# Altium PCB PCB1.PcbDoc
Units mil, origin at the board's own origin, x right, y up, seen from the top; angles counter-clockwise.
Board outline 3000 x 3000 mil, 4 copper layers (Top Layer, Internal Plane 1, Signal Layer 1, Bottom Layer), stack 30.634 mil thick; 6 components, 7 nets, 154 pads, 1 vias.
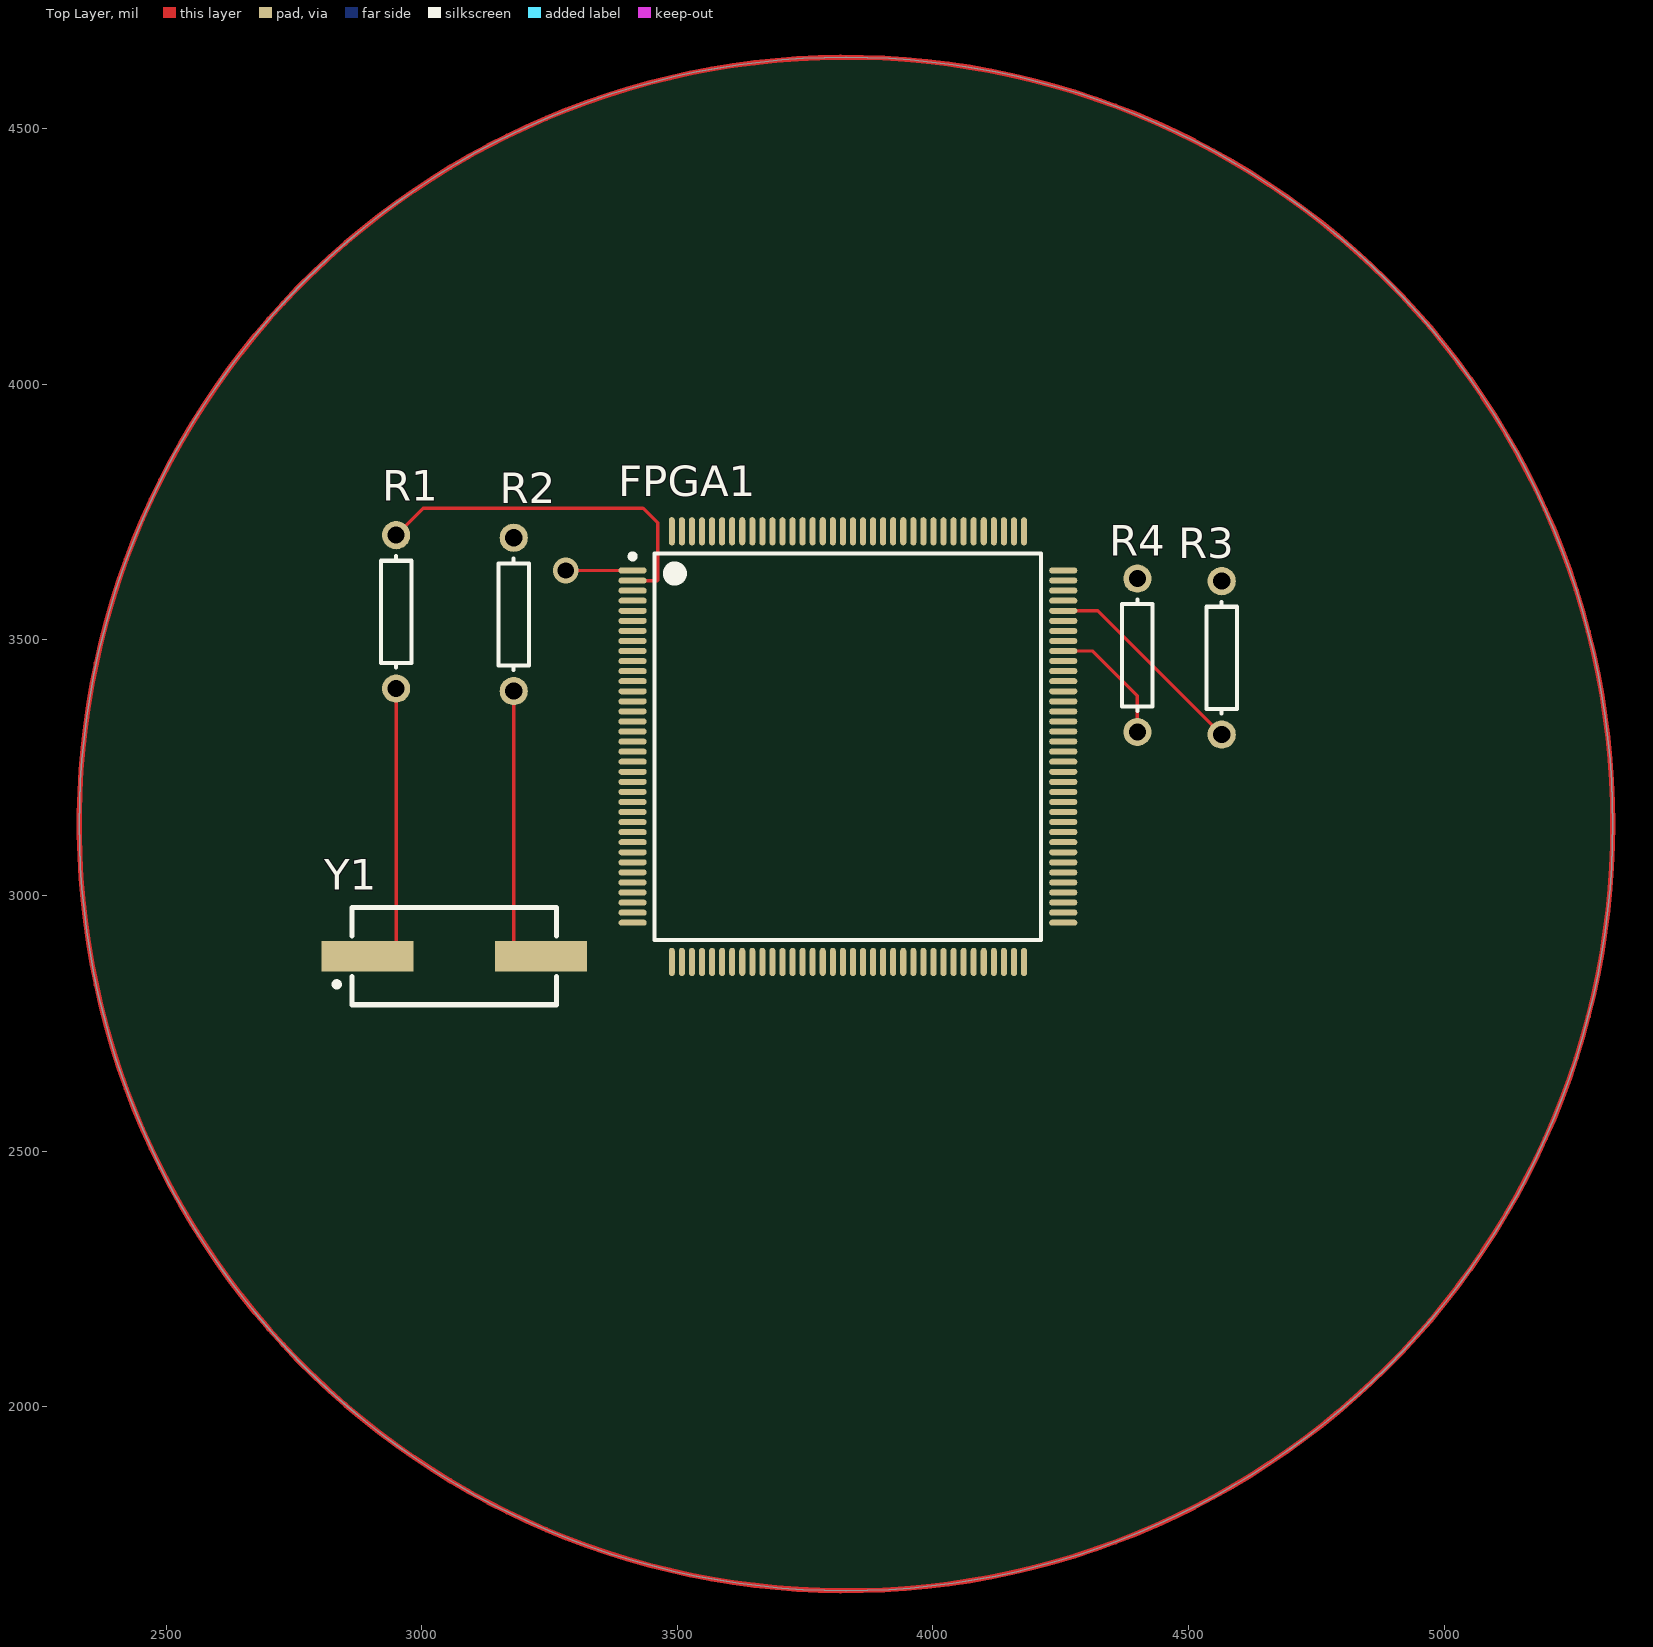
[diagram p0: Top Layer view]
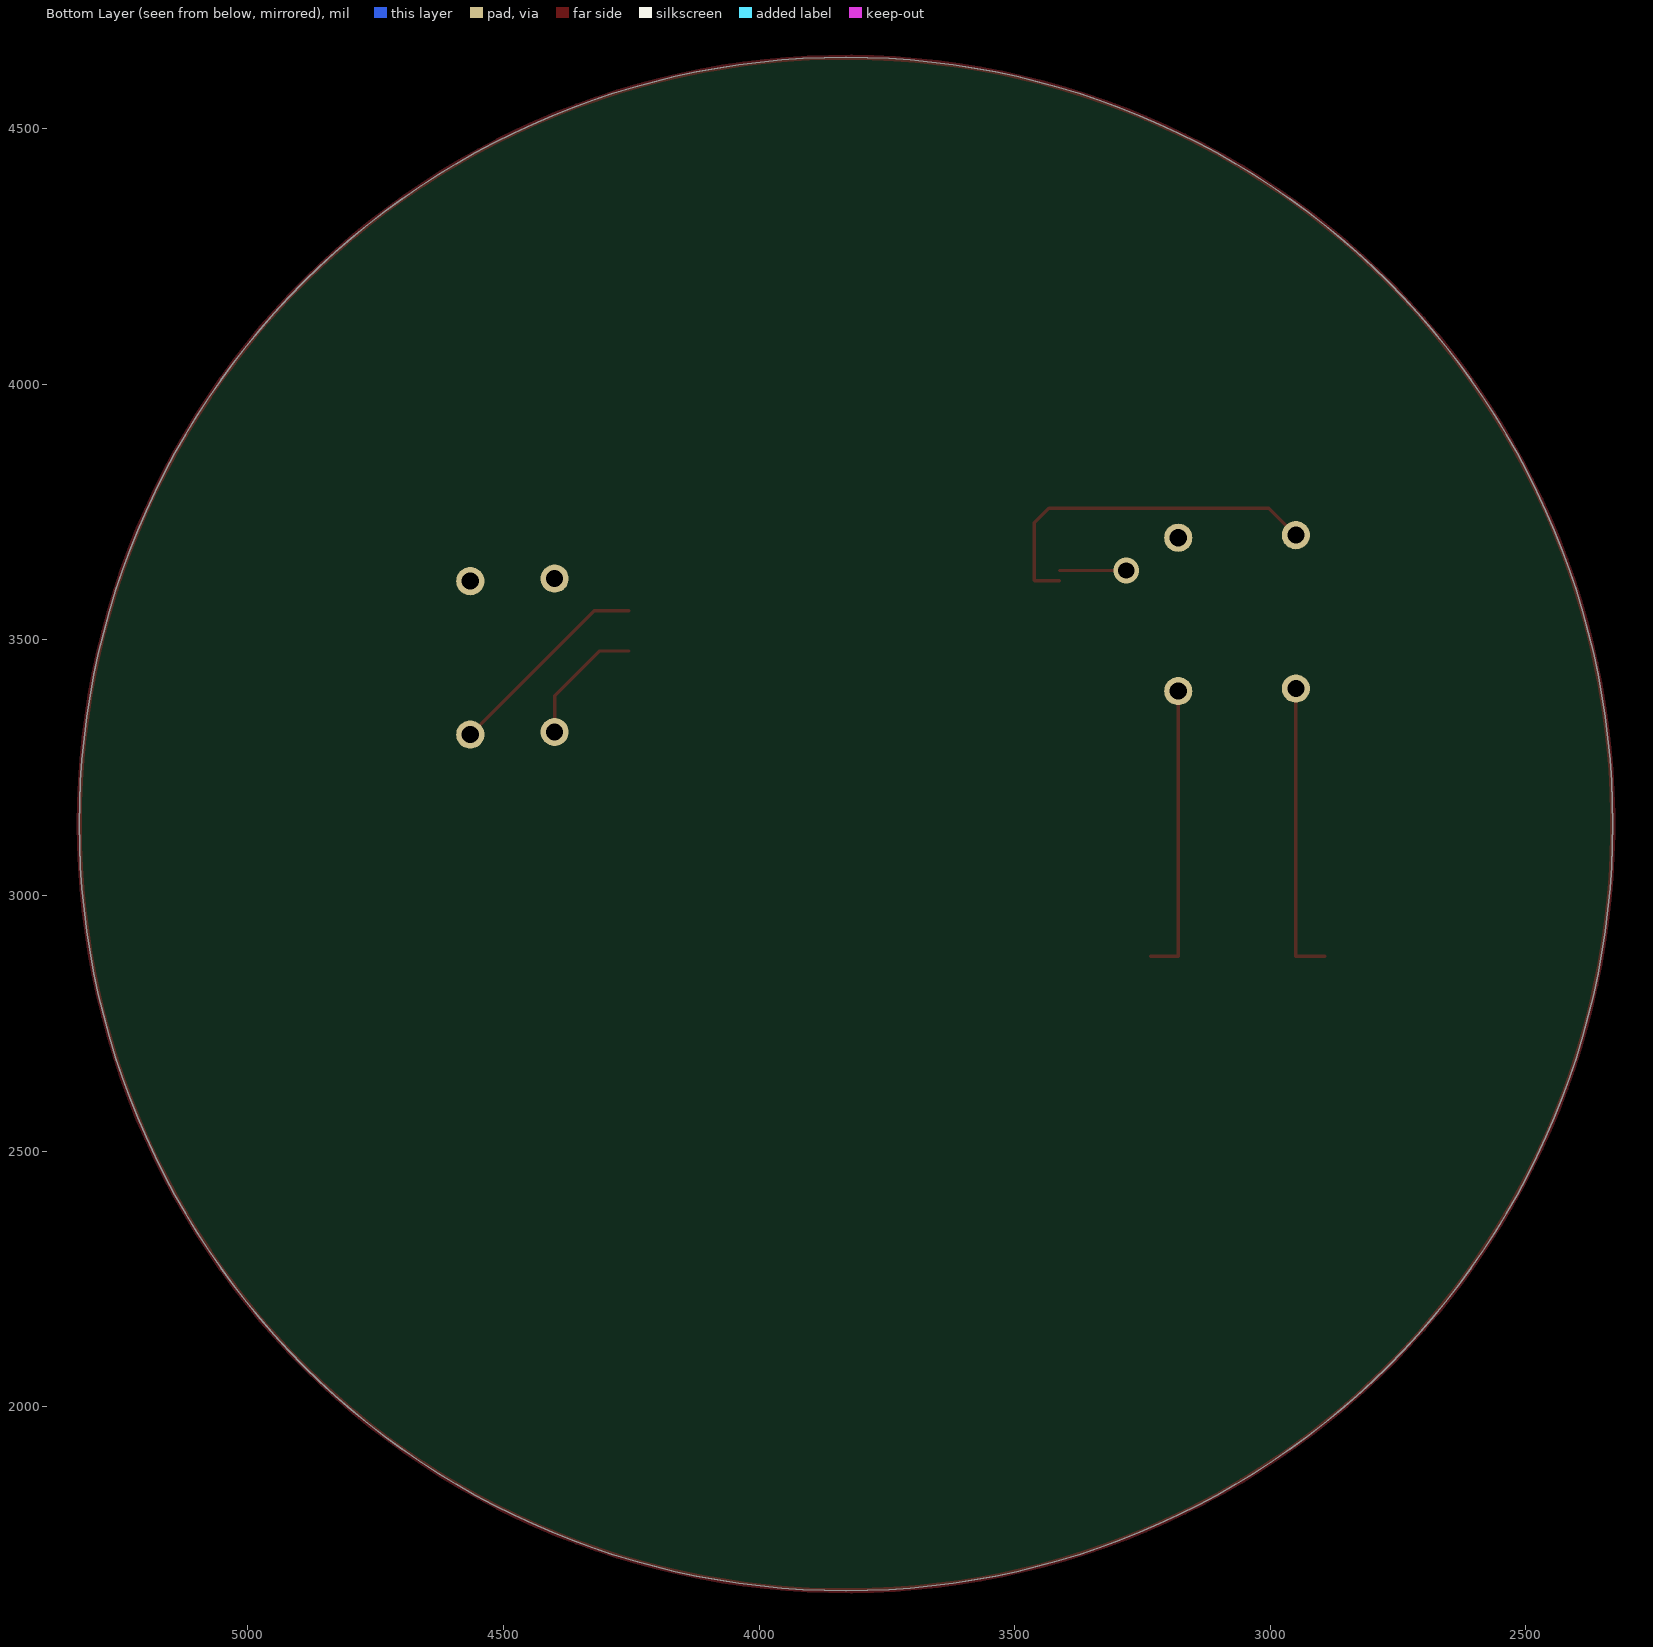
[diagram p1: Bottom Layer view, seen from below]
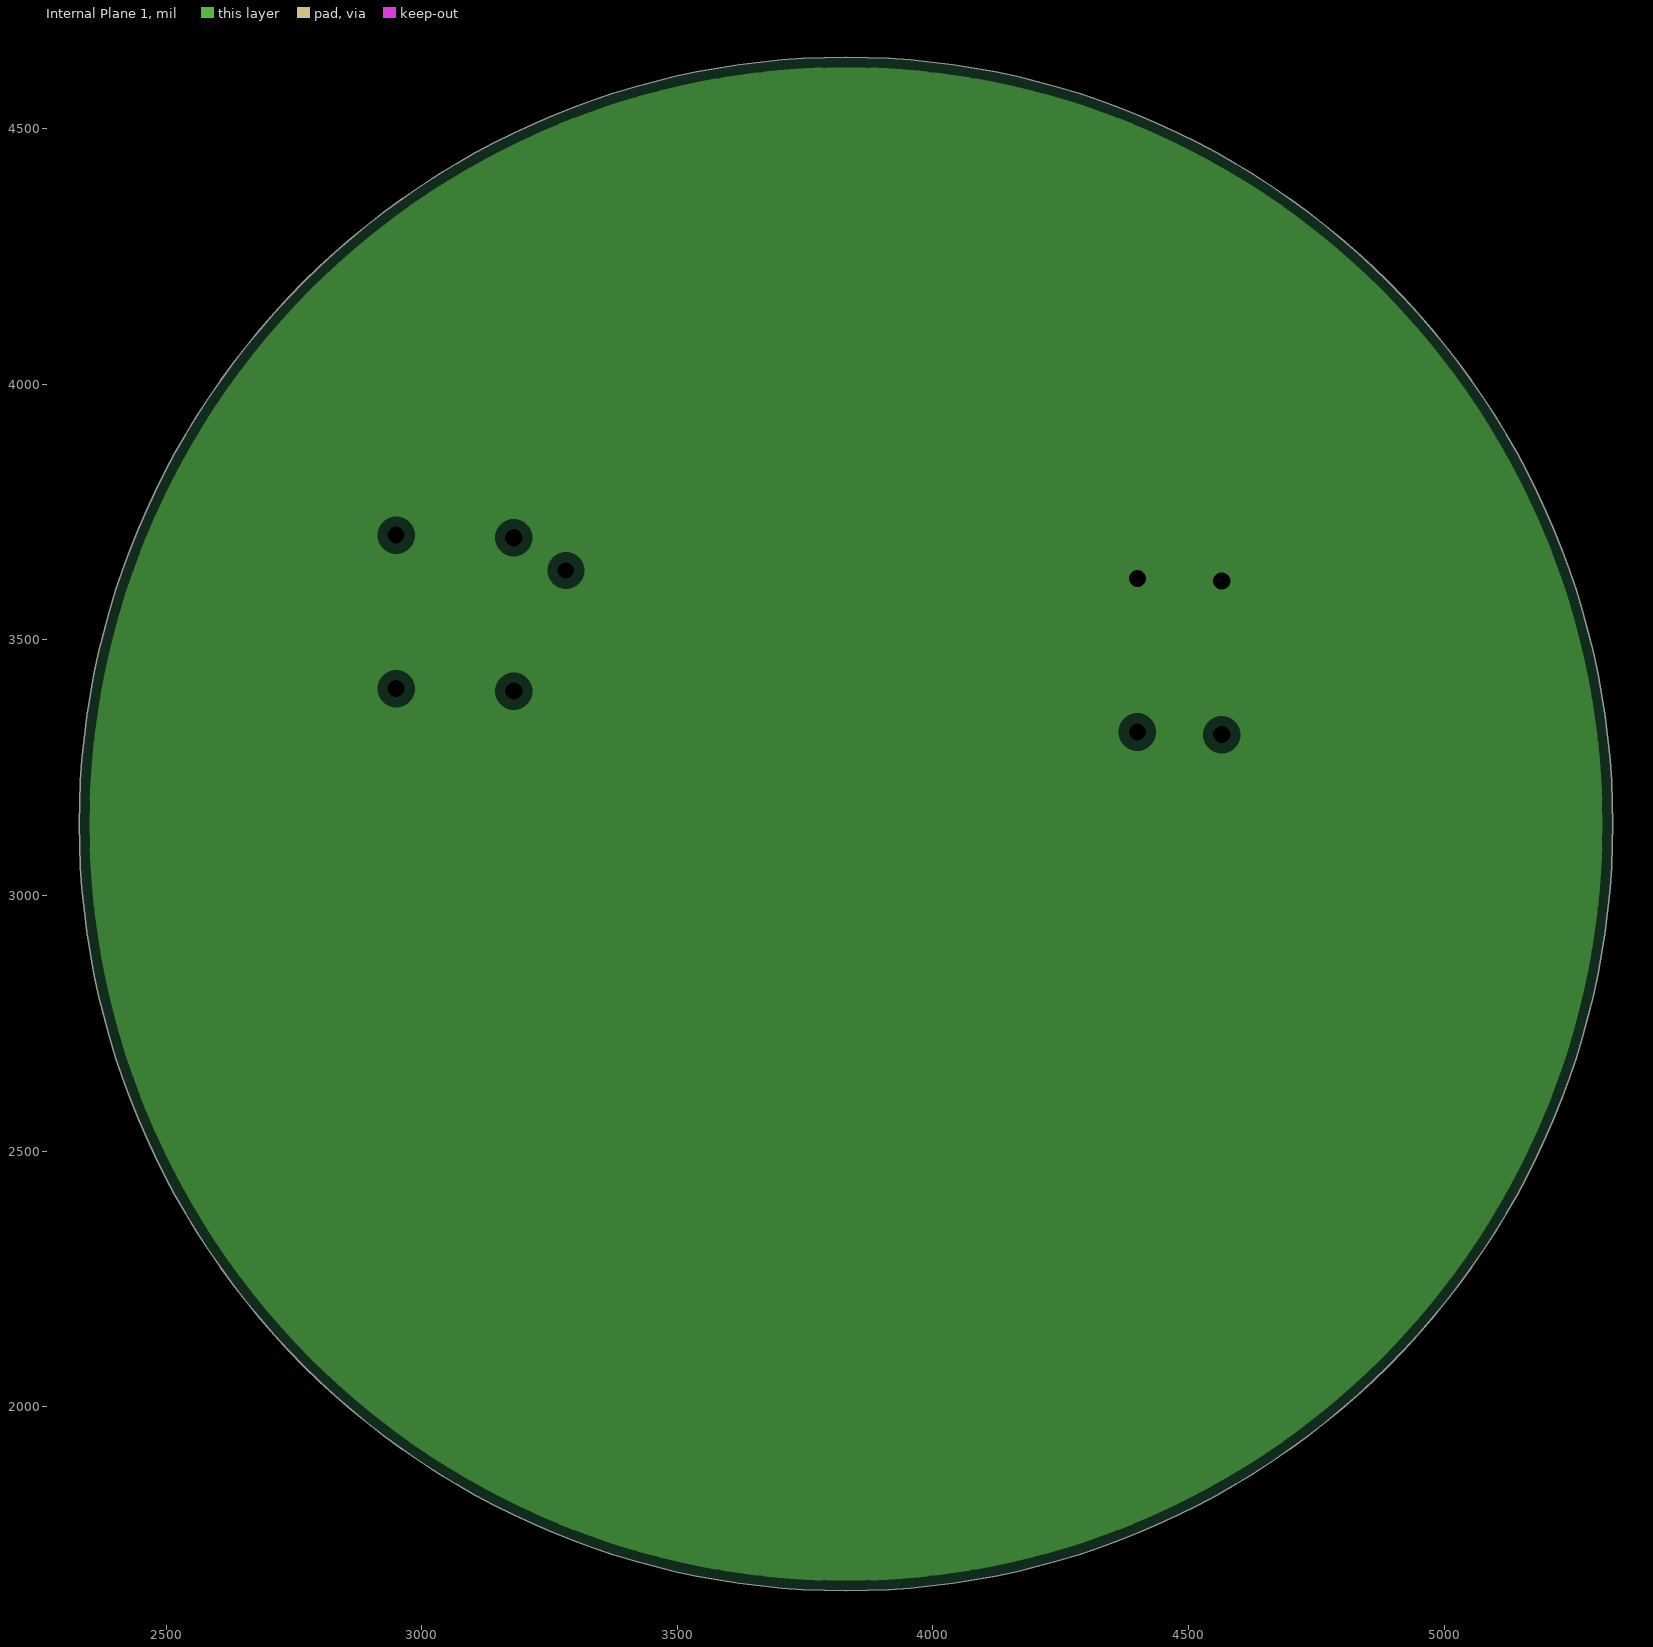
[diagram p2: Internal Plane 1, clearances drawn from the general rule]
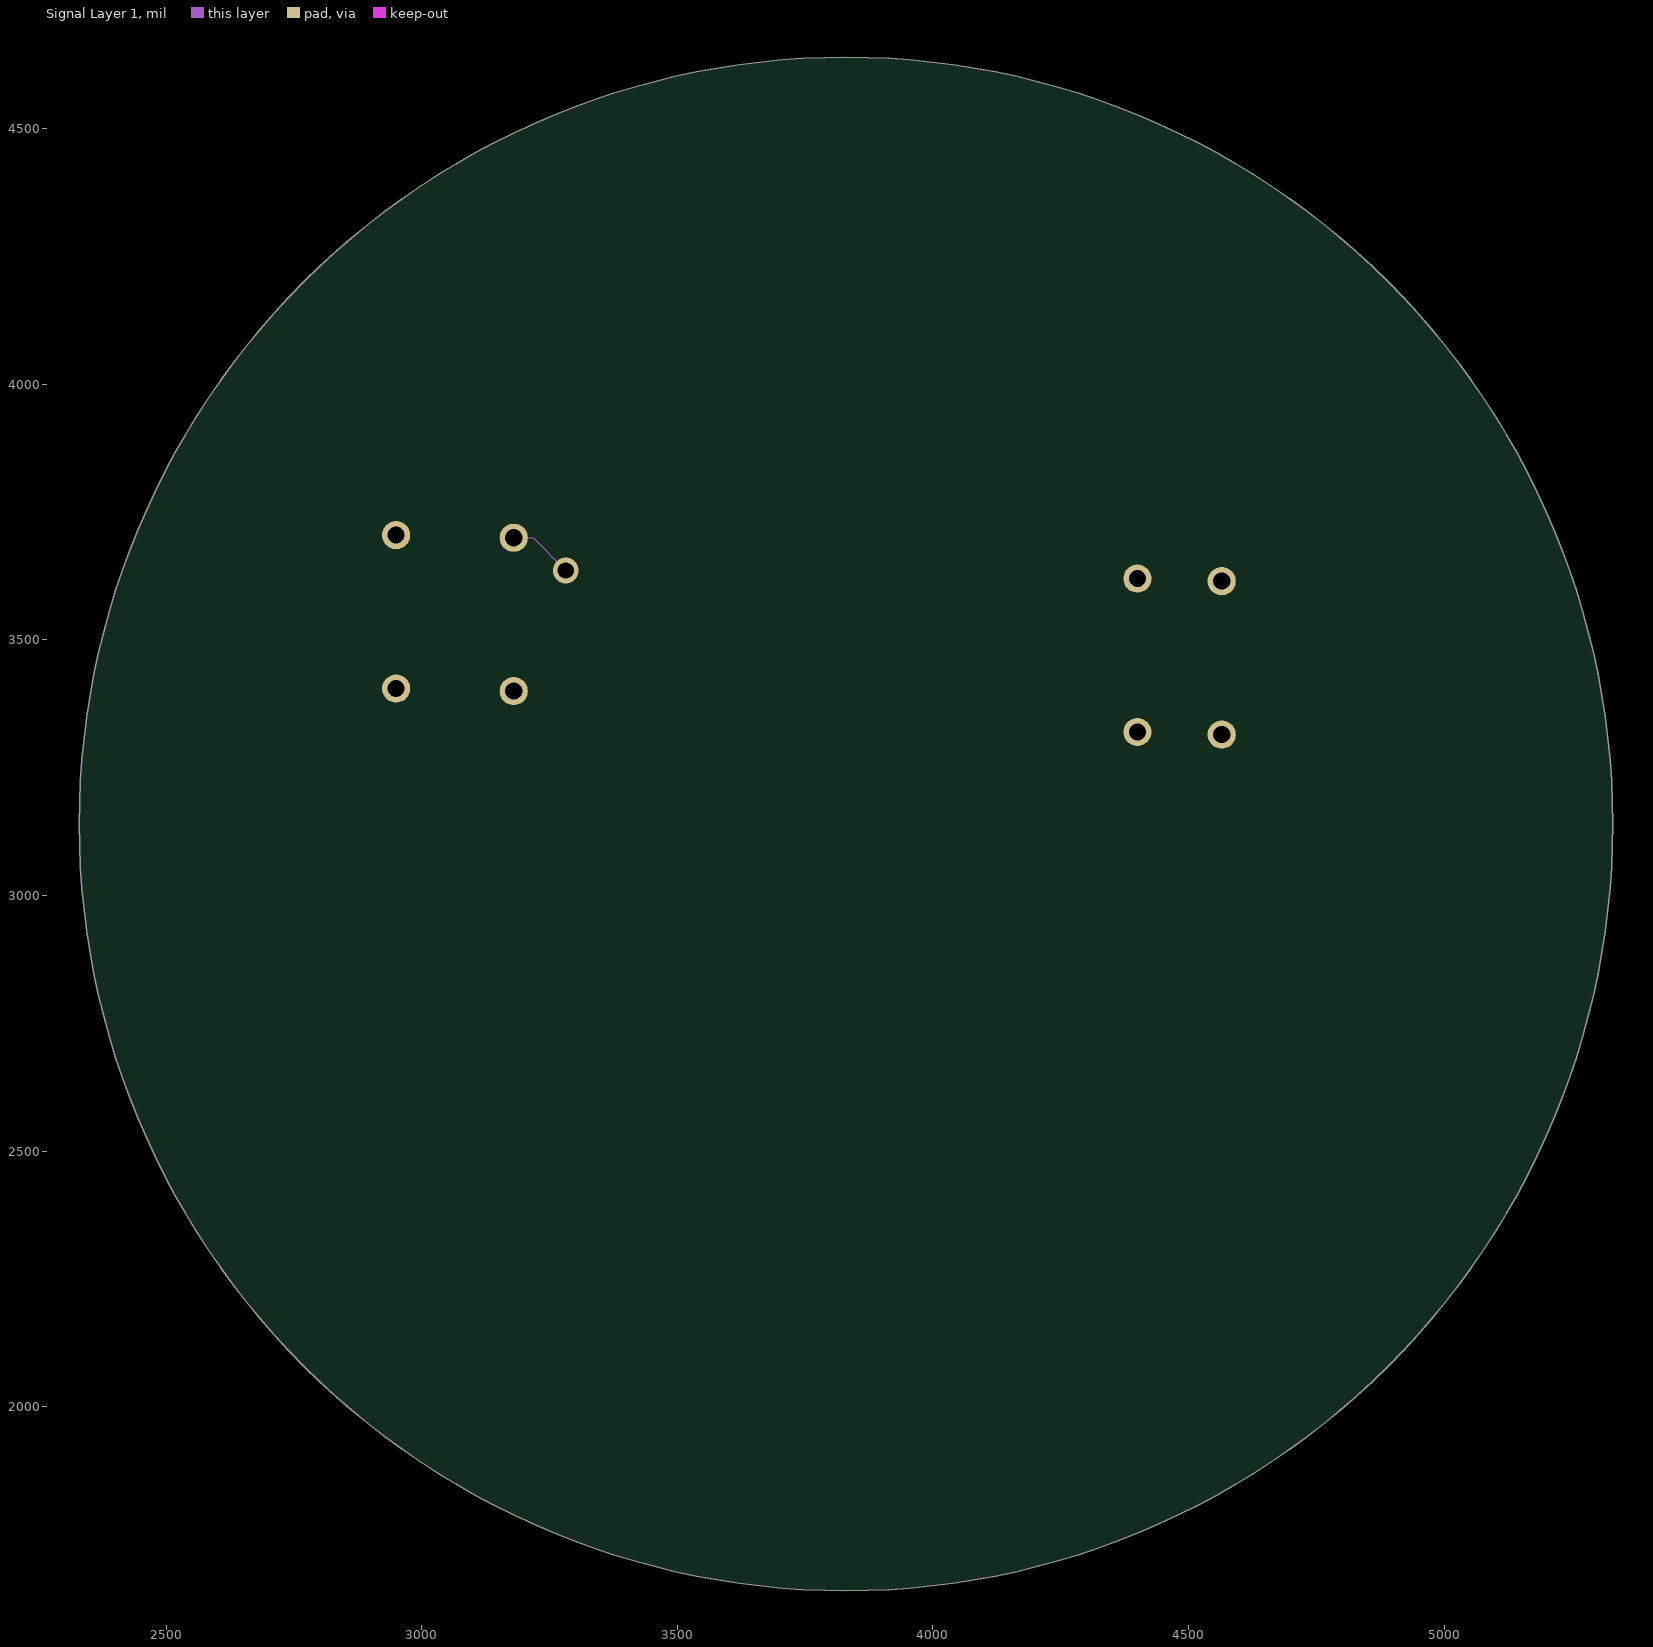
[diagram p3: Signal Layer 1]

## Layer stack, top to bottom
Top Solder: solder mask 0.4, Solder Resist, Dk 3.5
Top Layer: signal copper 1.4
Dielectric 1: core 10, FR-4, Dk 4.5
Internal Plane 1: plane copper 1.417, net VCC
Dielectric 2: prepreg 5, Dk 4.5
Signal Layer 1: signal copper 1.417
Dielectric 3: core 10, Dk 4.5
Bottom Layer: signal copper 1.4
Bottom Solder: solder mask 0.4, Solder Resist, Dk 3.5

## Board outline
2330,3140 ccw(c3830,3140) 3830,1640 ccw(c3830,3140) 5330,3140 ccw(c3830,3140) 3830,4640 ccw(c3830,3140)

## Design rules (kind name [scope] priority, off if disabled: settings)
Clearance [All] p1: gap=10 except(0: Arc-Text Track-Text SMDPad-Text THPad-Text Via-Text Fill-Text Poly-Text Region-Text Text-Text; 7.87: Track-Track SMDPad-SMDPad)
PlaneClearance [All] p1: clearance=20
PlaneConnect [All] p1: planeconnectstyle=Relief reliefexpansion=20 reliefentries=4 reliefconductorwidth=10 reliefairgap=10
PolygonConnect [All] p1: connectstyle=Relief reliefconductorwidth=10 reliefentries=4 polygonreliefangle="90 Angle" airgapwidth=10
RoomDefinition Probando_libreriaCreada [InComponentClass('Probando_libreriaCreada')] p1: confinementstyle=ConfineIn formatcopy=TRUE lockcomponents=FALSE outline 2773.74,2722.17 4697.48,2722.17 4697.48,3801.38 2773.74,3801.38
RoutingVias [All] p1: holewidth=32 width=50 viastyle="Through Hole" minholewidth=32 minwidth=50 maxholewidth=32 maxwidth=50
SolderMaskExpansion [All] p1: expansion=4 useseparateexpansions=TRUE expansionbottom=4
Width Width_VDD [InNet('VCC')] p1: maxlimit=20 minlimit=20 preferedwidth=20
Width [All] p2: maxlimit=11.89 minlimit=2.38 preferedwidth=11.89 toplayer_minwidth=6.56 toplayer_maxwidth=6.56 toplayer_prefwidth=6.56 midlayer1_maxwidth=2.38 midlayer1_prefwidth=2.38 bottomlayer_minwidth=11.89 impedancedriven=TRUE minimp=70.000000 maximp=70.000000 favimp=70.000000
28 further rules are at their usual default settings.

## Components (designator, comment, footprint, x,y, rotation, side; value= is the part's Value field where it differs from the comment)
FPGA1 "Xilinx TQG144" TSQFP50P2200X2200X160-144N_v2 3833.74,3291.38 r0 top
R1 "Res1" AXIAL-0.3 2950,3555 r270 top
R2 "Res1" AXIAL-0.3 3180,3550 r270 top
R3 "Res1" AXIAL-0.3 4565,3465 r90 top
R4 "Res1" AXIAL-0.3 4400,3470 r90 top
Y1 "crystal 25MHz" xtal 3063.74,2881.38 r0 top

## Footprints (in the part's own frame and the unit in brackets; to place one, negate y for a bottom-side part, rotate by r counter-clockwise, add the part's x,y. Pads: shape width x height; smd on the part's side, far side on the other; paste and mask are expansions set on the pad)
AXIAL-0.3 [mm] "Axial Device, Thru-Hole; 2 Leads; 0.3 in Pin Spacing"
  round 1.4 hole 0.85: 1(-3.81,0) 2(3.81,0)
  silkscreen extent -2.77,-0.76 2.77,0.76
TSQFP50P2200X2200X160-144N_v2 [mm] "TSQFP, 144-Leads, Body 20,00x20,00mm, Pitch 0,50mm, IPC Medium Density"
  oval 1.4x0.3 smd: 1(-10.7,8.75) 2(-10.7,8.25) 3(-10.7,7.75) 4(-10.7,7.25) 5(-10.7,6.75) 6(-10.7,6.25) 7(-10.7,5.75) 8(-10.7,5.25) 9(-10.7,4.75) 10(-10.7,4.25) 11(-10.7,3.75) 12(-10.7,3.25) 13(-10.7,2.75) 14(-10.7,2.25) 15(-10.7,1.75) 16(-10.7,1.25) 17(-10.7,0.75) 18(-10.7,0.25) 19(-10.7,-0.25) 20(-10.7,-0.75) 21(-10.7,-1.25) 22(-10.7,-1.75) 23(-10.7,-2.25) 24(-10.7,-2.75) 25(-10.7,-3.25) 26(-10.7,-3.75) 27(-10.7,-4.25) 28(-10.7,-4.75) 29(-10.7,-5.25) 30(-10.7,-5.75) 31(-10.7,-6.25) 32(-10.7,-6.75) 33(-10.7,-7.25) 34(-10.7,-7.75) 35(-10.7,-8.25) 36(-10.7,-8.75) 73(10.7,-8.75) 74(10.7,-8.25) 75(10.7,-7.75) 76(10.7,-7.25) 77(10.7,-6.75) 78(10.7,-6.25) 79(10.7,-5.75) 80(10.7,-5.25) 81(10.7,-4.75) 82(10.7,-4.25) 83(10.7,-3.75) 84(10.7,-3.25) 85(10.7,-2.75) 86(10.7,-2.25) 87(10.7,-1.75) 88(10.7,-1.25) 89(10.7,-0.75) 90(10.7,-0.25) 91(10.7,0.25) 92(10.7,0.75) 93(10.7,1.25) 94(10.7,1.75) 95(10.7,2.25) 96(10.7,2.75) 97(10.7,3.25) 98(10.7,3.75) 99(10.7,4.25) 100(10.7,4.75) 101(10.7,5.25) 102(10.7,5.75) 103(10.7,6.25) 104(10.7,6.75) 105(10.7,7.25) 106(10.7,7.75) 107(10.7,8.25) 108(10.7,8.75)
  oval 0.3x1.4 smd: 37(-8.75,-10.7) 38(-8.25,-10.7) 39(-7.75,-10.7) 40(-7.25,-10.7) 41(-6.75,-10.7) 42(-6.25,-10.7) 43(-5.75,-10.7) 44(-5.25,-10.7) 45(-4.75,-10.7) 46(-4.25,-10.7) 47(-3.75,-10.7) 48(-3.25,-10.7) 49(-2.75,-10.7) 50(-2.25,-10.7) 51(-1.75,-10.7) 52(-1.25,-10.7) 53(-0.75,-10.7) 54(-0.25,-10.7) 55(0.25,-10.7) 56(0.75,-10.7) 57(1.25,-10.7) 58(1.75,-10.7) 59(2.25,-10.7) 60(2.75,-10.7) 61(3.25,-10.7) 62(3.75,-10.7) 63(4.25,-10.7) 64(4.75,-10.7) 65(5.25,-10.7) 66(5.75,-10.7) 67(6.25,-10.7) 68(6.75,-10.7) 69(7.25,-10.7) 70(7.75,-10.7) 71(8.25,-10.7) 72(8.75,-10.7) 109(8.75,10.7) 110(8.25,10.7) 111(7.75,10.7) 112(7.25,10.7) 113(6.75,10.7) 114(6.25,10.7) 115(5.75,10.7) 116(5.25,10.7) 117(4.75,10.7) 118(4.25,10.7) 119(3.75,10.7) 120(3.25,10.7) 121(2.75,10.7) 122(2.25,10.7) 123(1.75,10.7) 124(1.25,10.7) 125(0.75,10.7) 126(0.25,10.7) 127(-0.25,10.7) 128(-0.75,10.7) 129(-1.25,10.7) 130(-1.75,10.7) 131(-2.25,10.7) 132(-2.75,10.7) 133(-3.25,10.7) 134(-3.75,10.7) 135(-4.25,10.7) 136(-4.75,10.7) 137(-5.25,10.7) 138(-5.75,10.7) 139(-6.25,10.7) 140(-6.75,10.7) 141(-7.25,10.7) 142(-7.75,10.7) 143(-8.25,10.7) 144(-8.75,10.7)
  silkscreen extent -10.82,-9.6 9.6,9.6, body extent -11,-11 11,11, height 1.6
xtal [mil]
  rect 180x60 smd: a0(-170,0) a1(170,0)
  silkscreen extent -235,-95 200,95, body extent -260,-94 260,94, height 169

## Part data
R1 R2 R3 R4: "Resistor"
Y1: library part CRY, "Surface Mount Crystal"

## Via types
v1: diameter 50, hole 32, Top Layer to Bottom Layer, 1 vias

## Nets (pads, with @x,y where several pads share a name; then routed paths per layer and width w, separated by ;. In a path a pad name is that pad's centre, name@x,y a point inside that pad or via, vN(x,y) a via of type N, cw(c..) or ccw(c..) an arc to the next point about the centre after c; other vN are vias at no path point)
GND: FPGA1.1 R2.1 | length 259
  Top Layer w6.56: v1(3282,3635.87) FPGA1.1
  Signal Layer 1 w2.38: R2.1 3217.87,3700 v1(3282,3635.87)
NetFPGA1_2: FPGA1.2 R1.1 | length 707.7
  Top Layer w6.56: R1.1 3003,3758 3433,3758 3462,3729 3462,3617.18 3461,3616.18 FPGA1.2
NetFPGA1_100: FPGA1.100 R4.1 | length 252.1
  Top Layer w6.56: FPGA1.100 4312.5,3478.39 4400,3390.89 R4.1
NetFPGA1_104: FPGA1.104 R3.1 | length 410.3
  Top Layer w6.56: FPGA1.104 4322.87,3557.13 R3.1
NetR1_2: R1.2 Y1.a0 | length 579.9
  Top Layer w6.56: Y1.a0 2950,2881.38 R1.2
NetR2_2: R2.2 Y1.a1 | length 572.4
  Top Layer w6.56: R2.2 3180,2881.38 Y1.a1
VCC: R3.2 R4.2
pads on no net: FPGA1.3 FPGA1.4 FPGA1.5 FPGA1.6 FPGA1.7 FPGA1.8 FPGA1.9 FPGA1.10 FPGA1.11 FPGA1.12 FPGA1.13 FPGA1.14 FPGA1.15 FPGA1.16 FPGA1.17 FPGA1.18 FPGA1.19 FPGA1.20 FPGA1.21 FPGA1.22 FPGA1.23 FPGA1.24 FPGA1.25 FPGA1.26 FPGA1.27 FPGA1.28 FPGA1.29 FPGA1.30 FPGA1.31 FPGA1.32 FPGA1.33 FPGA1.34 FPGA1.35 FPGA1.36 FPGA1.37 FPGA1.38 FPGA1.39 FPGA1.40 FPGA1.41 FPGA1.42 FPGA1.43 FPGA1.44 FPGA1.45 FPGA1.46 FPGA1.47 FPGA1.48 FPGA1.49 FPGA1.50 FPGA1.51 FPGA1.52 FPGA1.53 FPGA1.54 FPGA1.55 FPGA1.56 FPGA1.57 FPGA1.58 FPGA1.59 FPGA1.60 FPGA1.61 FPGA1.62 FPGA1.63 FPGA1.64 FPGA1.65 FPGA1.66 FPGA1.67 FPGA1.68 FPGA1.69 FPGA1.70 FPGA1.71 FPGA1.72 FPGA1.73 FPGA1.74 FPGA1.75 FPGA1.76 FPGA1.77 FPGA1.78 FPGA1.79 FPGA1.80 FPGA1.81 FPGA1.82 FPGA1.83 FPGA1.84 FPGA1.85 FPGA1.86 FPGA1.87 FPGA1.88 FPGA1.89 FPGA1.90 FPGA1.91 FPGA1.92 FPGA1.93 FPGA1.94 FPGA1.95 FPGA1.96 FPGA1.97 FPGA1.98 FPGA1.99 FPGA1.101 FPGA1.102 FPGA1.103 FPGA1.105 FPGA1.106 FPGA1.107 FPGA1.108 FPGA1.109 FPGA1.110 FPGA1.111 FPGA1.112 FPGA1.113 FPGA1.114 FPGA1.115 FPGA1.116 FPGA1.117 FPGA1.118 FPGA1.119 FPGA1.120 FPGA1.121 FPGA1.122 FPGA1.123 FPGA1.124 FPGA1.125 FPGA1.126 FPGA1.127 FPGA1.128 FPGA1.129 FPGA1.130 FPGA1.131 FPGA1.132 FPGA1.133 FPGA1.134 FPGA1.135 FPGA1.136 FPGA1.137 FPGA1.138 FPGA1.139 FPGA1.140 FPGA1.141 FPGA1.142 FPGA1.143 FPGA1.144
copper on no net: | length 9424.8
  Top Layer w10: 5330,3140 ccw(c3830,3140) 5330,3140

## Polygon pours and split planes (outlines as drawn)
VCC on Internal Plane 1 (split plane): 281 vertices, not listed, extent 2350.01,1660.01 5309.99,4619.99